# EAGLE board shield_romwriter (EAGLE 7.3.0)
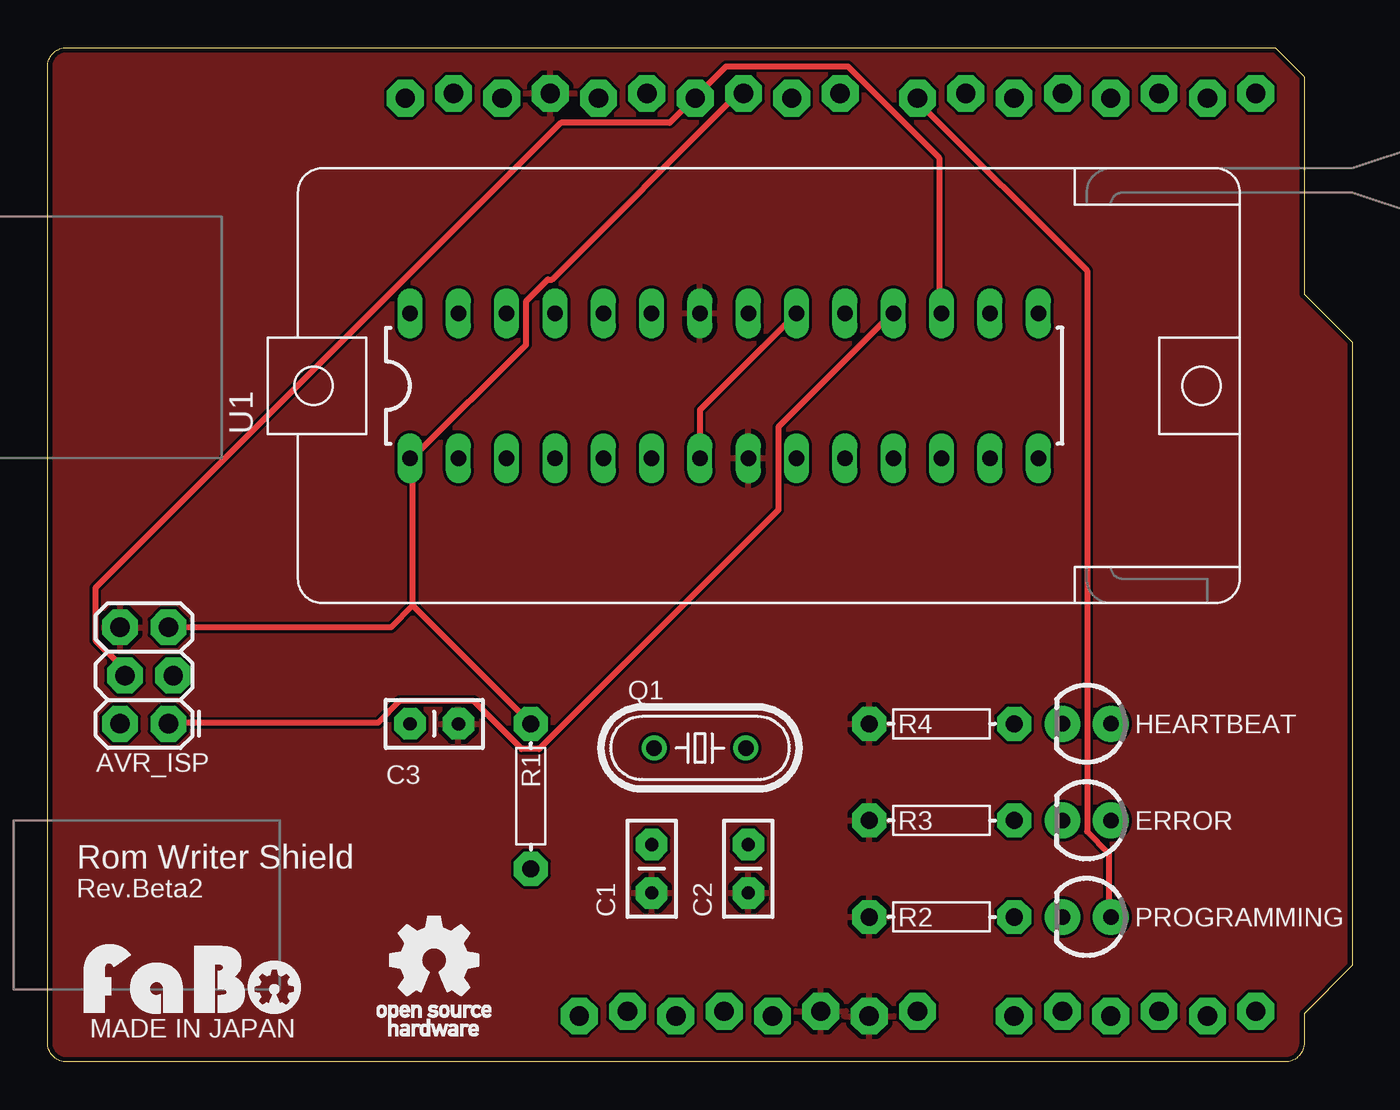
[diagram p0: board, top side]
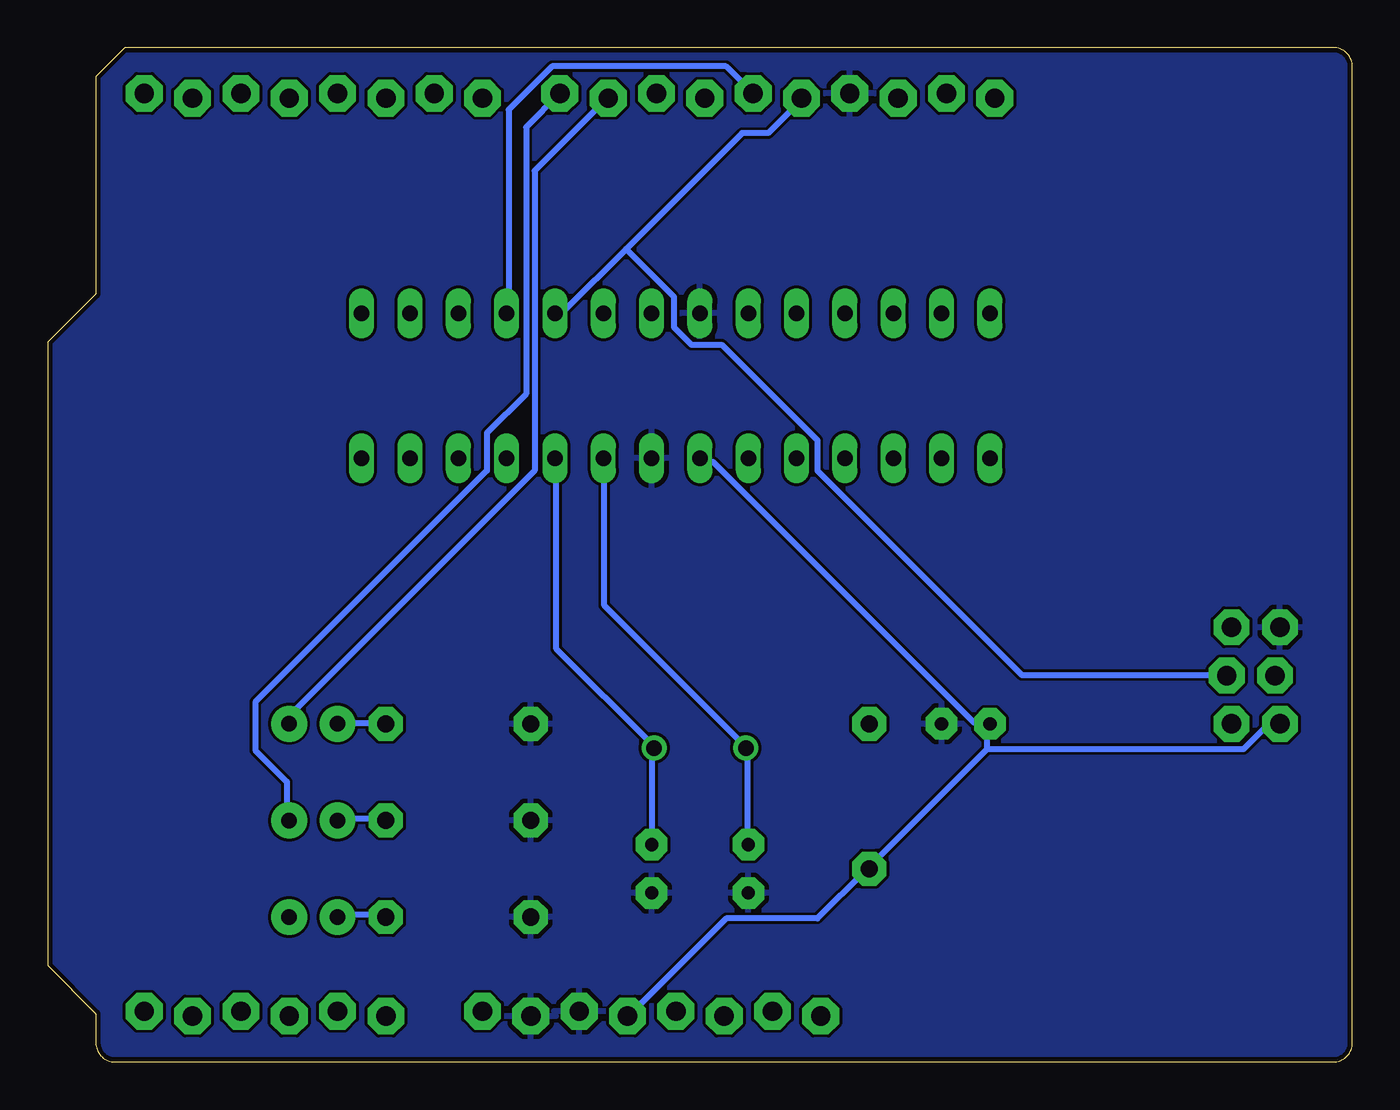
[diagram p1: board, bottom side, seen from below]

Size 68.58 x 53.34 mm. Coordinates in mm from the lower left corner, seen from the top.
Copper layers (1*16): Top 0.035mm / dielectric 1.5mm / Bottom 0.035mm
Design rules "Elecrow_2-layer_eagle_rule": minimum track width 6mil, minimum drill 12mil, track to track 6mil, track to pad 6mil, pad to pad 6mil, via to via 6mil, smd to smd 0mil, copper to edge 10mil, drill to drill 10mil, minimum pad ring 10mil, minimum via ring 6mil, stop-mask expansion 2mil, vias tented up to drill 100mil, thermal gap 10mil
Net classes: 0 default: width 0.305 mm

## Footprints (pad centres in the part's own frame; a part is rotated, then mirrored left to right if it is on the bottom)
CAP-PTH-SMALL = drill 0.7 pad 1.651 octagon: 1 -1.27,0; 2 1.27,0
LED3MM = drill 0.813 pad 1.88: A -1.27,0; K 1.27,0
2X3_LOCK = drill 1.016 pad 1.88 octagon: 1 0,0; 2 0,2.54; 3 2.54,-0.254; 4 2.54,2.286; 5 5.08,0; 6 5.08,2.54
HC49/S = drill 0.813: 1 -2.413,0; 2 2.413,0
RES-AXL-REGULAR = drill 0.9 pad 1.778 octagon: P$1 -3.81,0; P$2 3.81,0
ZERO_PRESSURE_SOCKET_DIL28 = drill 0.813 long: 1 -16.51,-3.81; 2 -13.97,-3.81; 3 -11.43,-3.81; 4 -8.89,-3.81; 5 -6.35,-3.81; 6 -3.81,-3.81; 7 -1.27,-3.81; 8 1.27,-3.81; 9 3.81,-3.81; 10 6.35,-3.81; 11 8.89,-3.81; 12 11.43,-3.81; 13 13.97,-3.81; 14 16.51,-3.81; 15 16.51,3.81; 16 13.97,3.81; 17 11.43,3.81; 18 8.89,3.81; 19 6.35,3.81; 20 3.81,3.81; 21 1.27,3.81; 22 -1.27,3.81; 23 -3.81,3.81; 24 -6.35,3.81; 25 -8.89,3.81; 26 -11.43,3.81; 27 -13.97,3.81; 28 -16.51,3.81
ARDUINO_UNO_R3_NOLABEL = drill 1.016 pad 1.93 octagon: 3V3 35.56,2.667; 5V 38.1,2.413; A0 50.8,2.413; A1 53.34,2.667; A2 55.88,2.413; A3 58.42,2.667; A4 60.96,2.413; A5 63.5,2.667; AREF 23.876,50.673; D0 63.5,50.927; D1 60.96,50.673; D2 58.42,50.927; D3 55.88,50.673; D4 53.34,50.927; D5 50.8,50.673; D6 48.26,50.927; D7 45.72,50.673; D8 41.656,50.927; D9 39.116,50.673; D10 36.576,50.927; D11 34.036,50.673; D12 31.496,50.927; D13 28.956,50.673; GND1 43.18,2.413; GND2 40.64,2.667; GND3 26.416,50.927; IOREF 30.48,2.667; RESERVED 27.94,2.413; RESET 33.02,2.413; SCL 18.796,50.673; SDA 21.336,50.927; VIN 45.72,2.667

## Placement (x,y rotation side)
C1  22pF  [CAP-PTH-SMALL]  31.75,10.16 270 top
C2  22pF  [CAP-PTH-SMALL]  36.83,10.16 270 top
C3  0.01pF  [CAP-PTH-SMALL]  20.32,17.78 0 top
ERROR  [LED3MM]  54.61,12.7 180 top
HEARTBEAT  [LED3MM]  54.61,17.78 180 top
JP1  AVR_ISP  [2X3_LOCK]  6.35,17.78 90 top
PROGRAMMING  [LED3MM]  54.61,7.62 180 top
Q1  [HC49/S]  34.29,16.51 0 top
R1  10k  [RES-AXL-REGULAR]  25.4,13.97 270 top
R2  1k  [RES-AXL-REGULAR]  46.99,7.62 0 top
R3  1k  [RES-AXL-REGULAR]  46.99,12.7 0 top
R4  1k  [RES-AXL-REGULAR]  46.99,17.78 0 top
U1  ZERO_PRESSURE_SOCKET  [ZERO_PRESSURE_SOCKET_DIL28]  35.56,35.56 0 top
U2  [ARDUINO_UNO_R3_NOLABEL]  0,0 0 top
U$1  [LOGO_FABO_M]  7.62,2.54 0 top
U$3  [LOGO_OSHW_T_M]  20.32,5.33 0 top

## Library data of the parts
C1-C3 R1-R4 U1 U2 U$3 = GClue
ERROR HEARTBEAT PROGRAMMING = SparkFun-LED
JP1 = mylib
Q1 = adafruit; OC_FARNELL: 1667008; OC_NEWARK: unknown
U$1 = FaBo

## Nets
3V3: U2.3V3
+5V: C3.1 JP1.2 R1.P$2 U1.7 U1.20 U2.5V
ERR_LED: ERROR.A U2.D8
GND: C1.2 C2.2 C3.2 JP1.6 R2.P$1 R3.P$1 R4.P$1 U1.8 U1.22 U2.GND1 U2.GND2 U2.GND3
HBT_LED: HEARTBEAT.A U2.D9
MISO: JP1.1 U1.18 U2.D12
MOSI: JP1.4 U1.17 U2.D11
N$6: PROGRAMMING.K R2.P$2
N$7: ERROR.K R3.P$2
N$8: HEARTBEAT.K R4.P$2
PGM_LED: PROGRAMMING.A U2.D7
RESET: JP1.5 R1.P$1 U1.1 U2.D10
SCK: JP1.3 U1.19 U2.D13
VIN: U2.VIN
XTAL1: C1.1 Q1.1 U1.9
XTAL2: C2.1 Q1.2 U1.10

## Tracks (layer width: path | path; a pad name or v marks a point on that pad's centre or on a via)
+5V
  Top 0.305: U1.7 34.29,34.29 U1.20
  Bottom 0.305: 19.2,16.46 19.2,17.6 C3.1 19.2,17.83 19.89,17.83 33.6,31.55 34.29,31.55 U1.7 | 19.2,16.46 25.38,10.29 R1.P$2 25.6,10.06 28.12,7.54 32.92,7.54 37.95,2.52 U2.5V | 19.2,16.46 5.71,16.46 4.57,17.6 3.89,17.6 JP1.2
ERR_LED
  Bottom 0.305: U2.D8 43.43,49.15 43.43,35.13 45.49,33.07 45.49,31.09 57.66,18.92 57.66,16.38 56.01,14.73 56.01,12.8 ERROR.A
GND
  pour Bottom: -1.27,54.61 69.85,54.61 69.85,-1.27 -1.27,-1.27
  pour Top: -1.27,54.61 69.85,54.61 69.85,-1.27 -1.27,-1.27
HBT_LED
  Bottom 0.305: HEARTBEAT.A 55.78,17.83 55.78,18.29 42.98,31.09 42.98,46.86 39.32,50.52 U2.D9
MISO
  Top 0.305: JP1.1 6.4,17.83 17.37,17.83 18.52,18.97 22.4,18.97 24.92,16.46 25.83,16.46 38.41,29.03 38.41,33.38 44.35,39.32 U1.18
  Bottom 0.305: U2.D12 32.92,52.35 42.06,52.35 44.35,50.06 44.35,39.55 U1.18
MOSI
  Top 0.305: U1.17 46.86,39.55 46.86,47.55 42.06,52.35 35.66,52.35 34.06,50.75 U2.D11 33.83,50.52 32.69,49.38 26.98,49.38 2.52,24.92 2.52,22.17 3.89,20.8 3.89,20.34 JP1.4
N$6
  Bottom 0.305: R2.P$2 50.98,7.77 53.26,7.77 PROGRAMMING.K
N$7
  Bottom 0.305: R3.P$2 50.98,12.8 53.26,12.8 ERROR.K
N$8
  Bottom 0.305: R4.P$2 50.98,17.83 53.26,17.83 HEARTBEAT.K
PGM_LED
  Top 0.305: PROGRAMMING.A 55.78,7.77 55.78,10.97 54.63,12.12 54.63,41.6 45.72,50.52 U2.D7
RESET
  Top 0.305: 19.2,24 19.2,31.55 U1.1 19.2,31.77 25.15,37.72 25.15,40.01 26.29,41.15 26.52,41.15 36.12,50.75 36.58,50.75 U2.D10 | 19.2,24 25.38,17.83 R1.P$1 | JP1.5 18.06,22.86 19.2,24
SCK
  Bottom 0.305: 38.18,42.75 32.08,48.84 30.71,48.84 29.03,50.52 U2.D13 | 38.18,42.75 41.38,39.55 41.83,39.55 U1.19 | 38.18,42.75 35.66,40.23 35.66,38.63 34.75,37.72 33.15,37.72 28.12,32.69 28.12,31.09 17.37,20.34 6.63,20.34 JP1.3
XTAL1
  Bottom 0.305: C1.1 31.77,11.43 31.77,16.46 Q1.1 32,16.69 39.32,24 39.32,31.55 U1.9
XTAL2
  Bottom 0.305: C2.1 36.8,11.43 36.8,16.46 Q1.2 36.8,16.69 41.83,21.72 41.83,31.55 U1.10

## Text on the board
tPlace: Rom Writer Shield | Rev.Beta2 | MADE IN JAPAN